# Altium PCB Power_Board.PcbDoc
Units mil, origin at the board's own origin, x right, y up, seen from the top; angles counter-clockwise.
Board outline 2965.03 x 3148.15 mil, 4 copper layers (Power, PGND, A_signal, Digital_signal), stack 23.756 mil thick; 119 components, 62 nets, 400 pads, 313 vias.
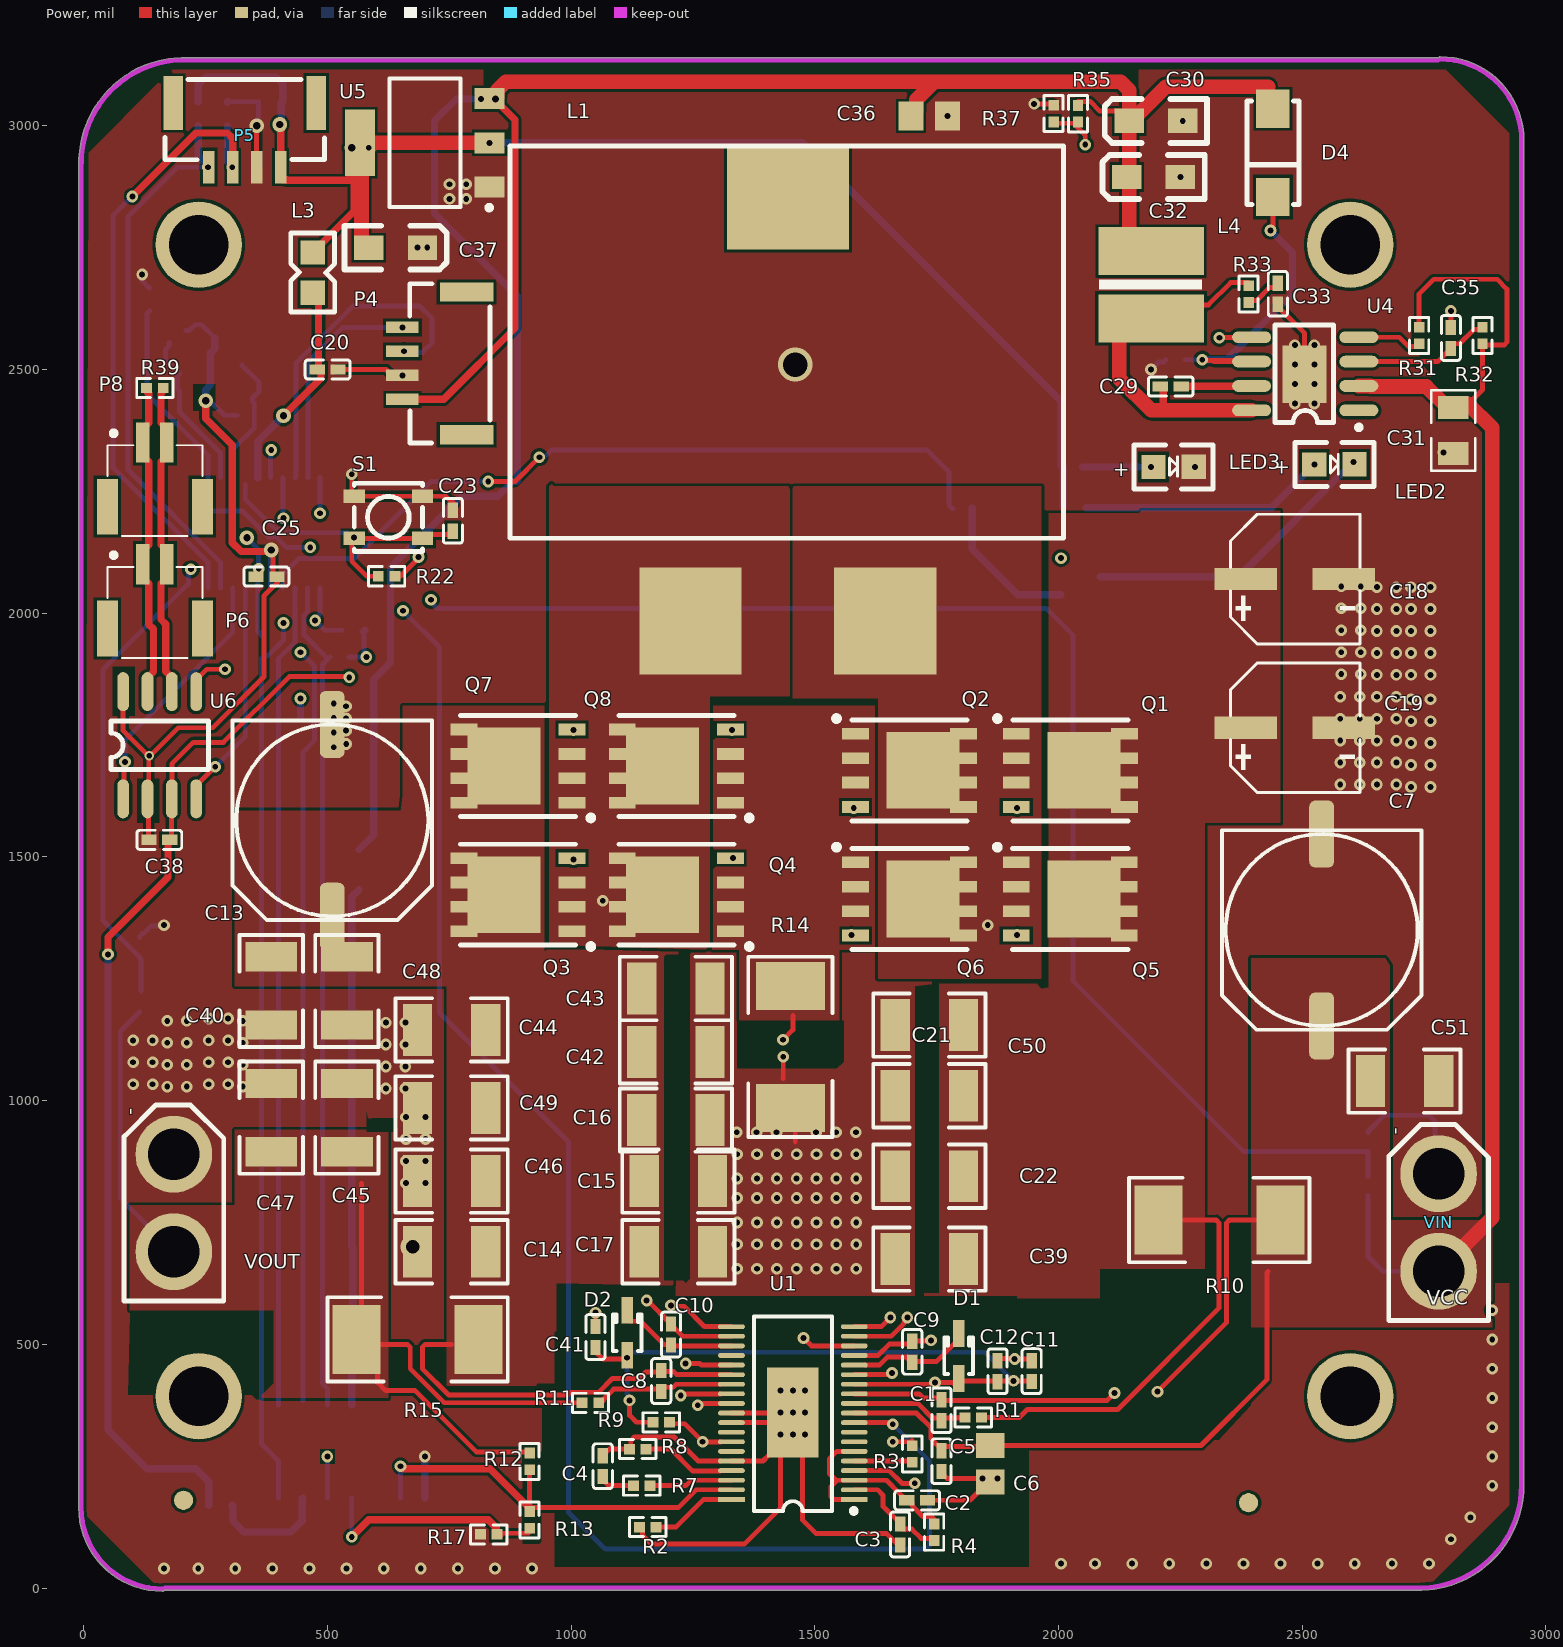
[diagram p0: Power view]
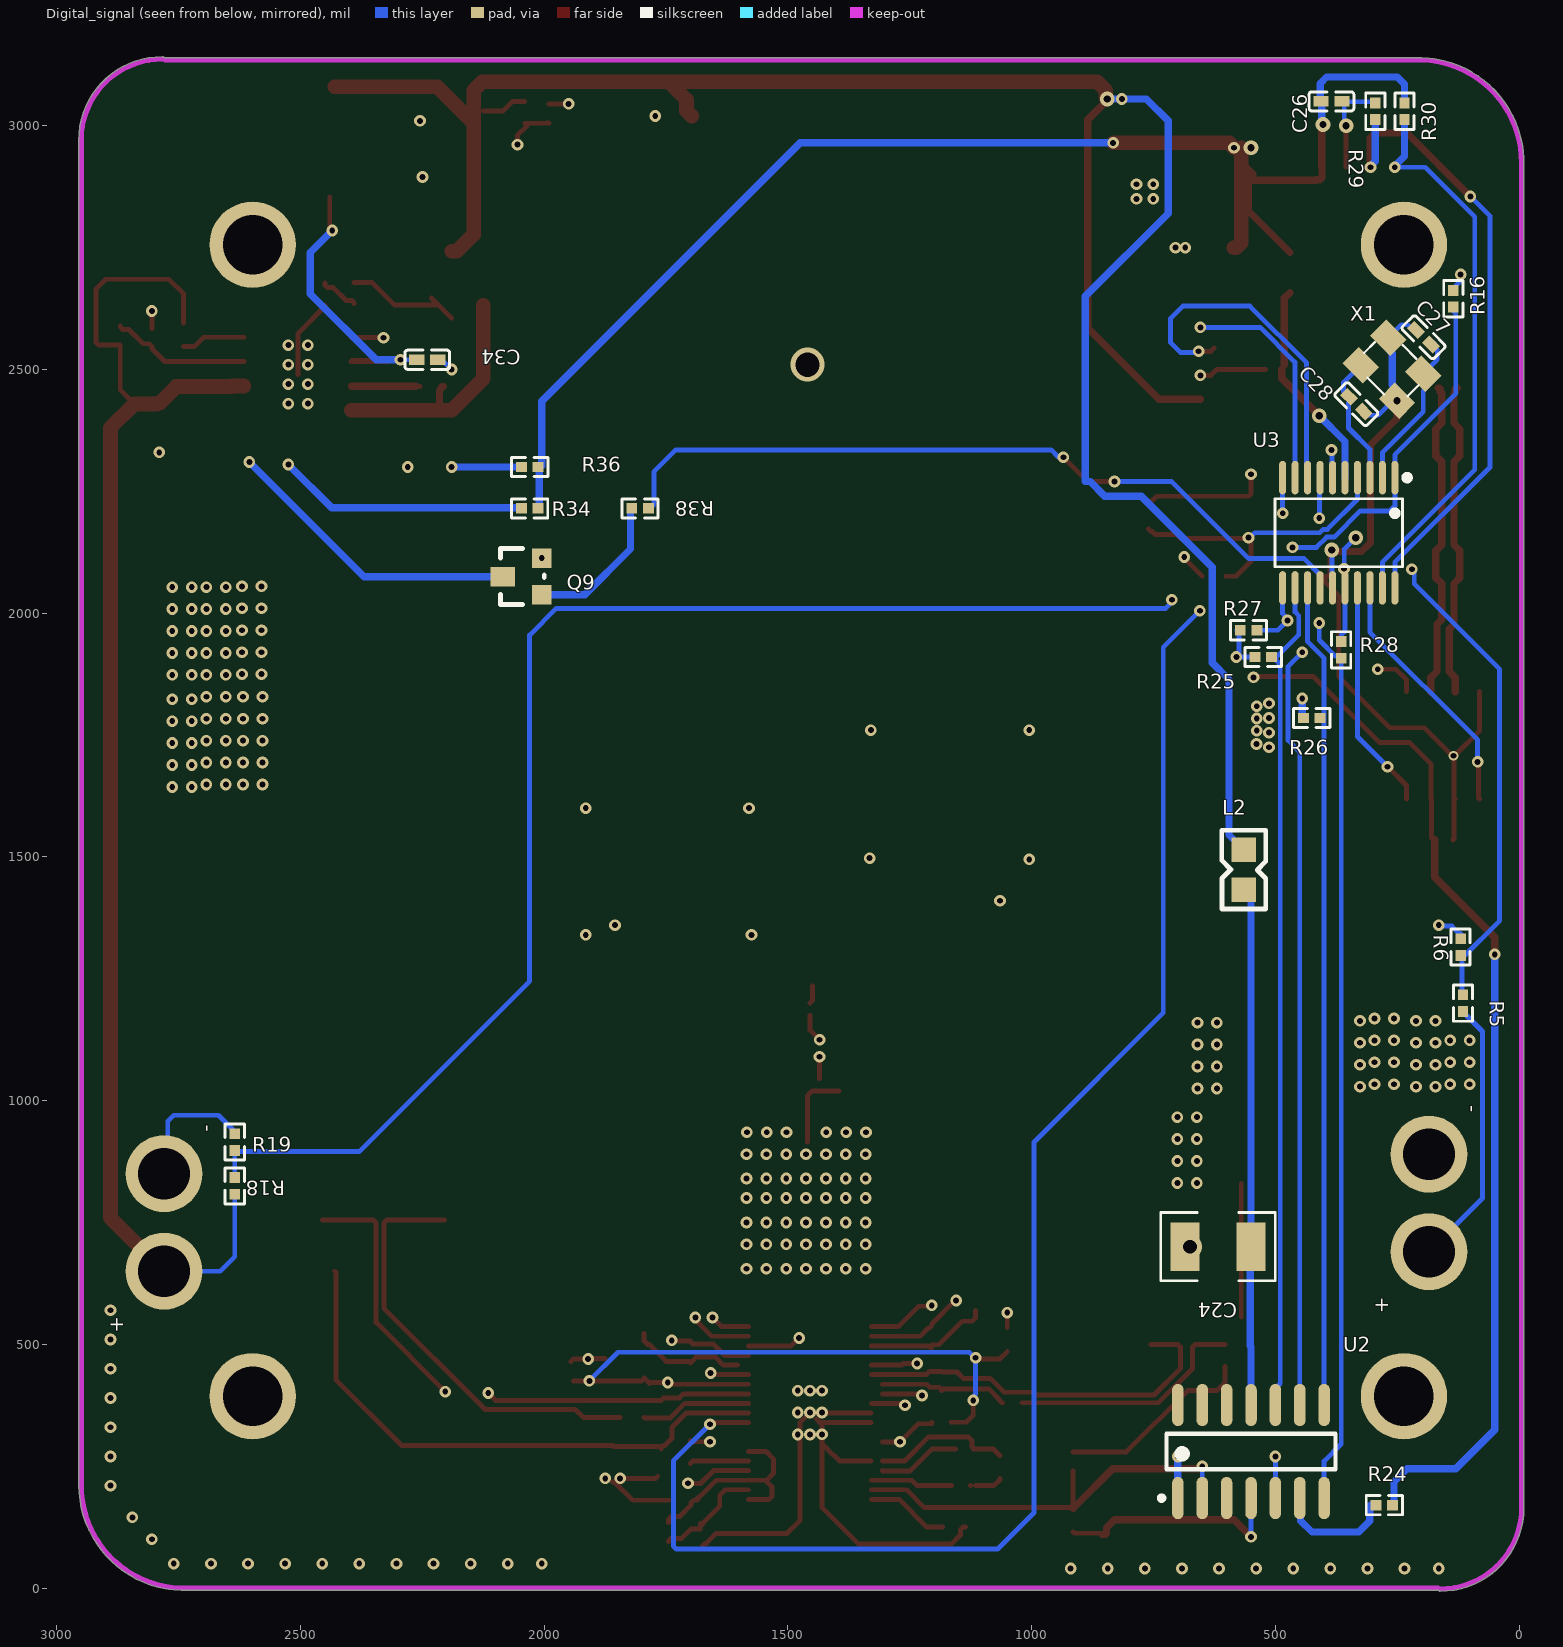
[diagram p1: Digital_signal view, seen from below]
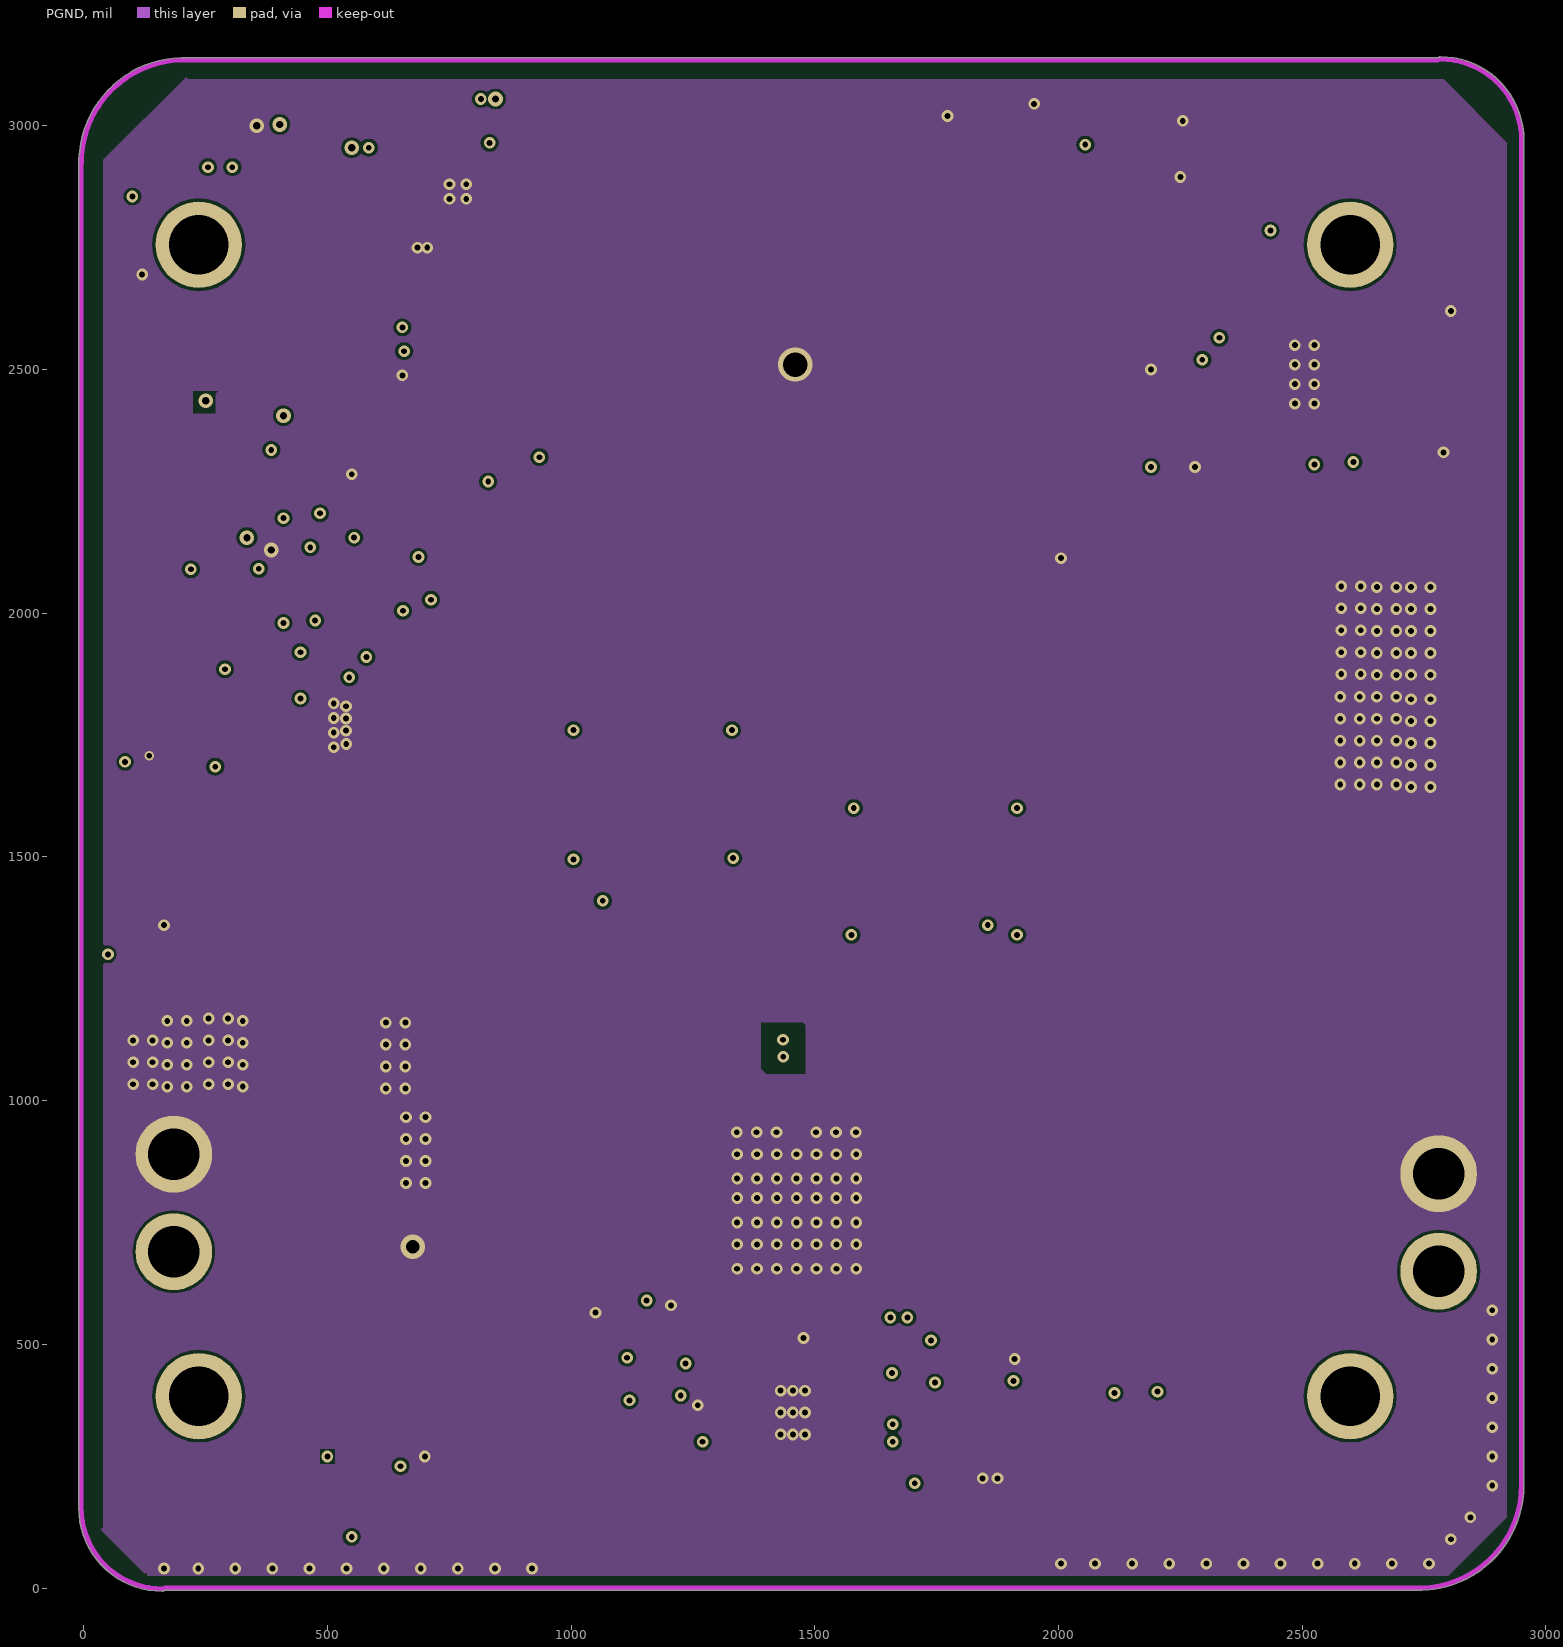
[diagram p2: PGND]
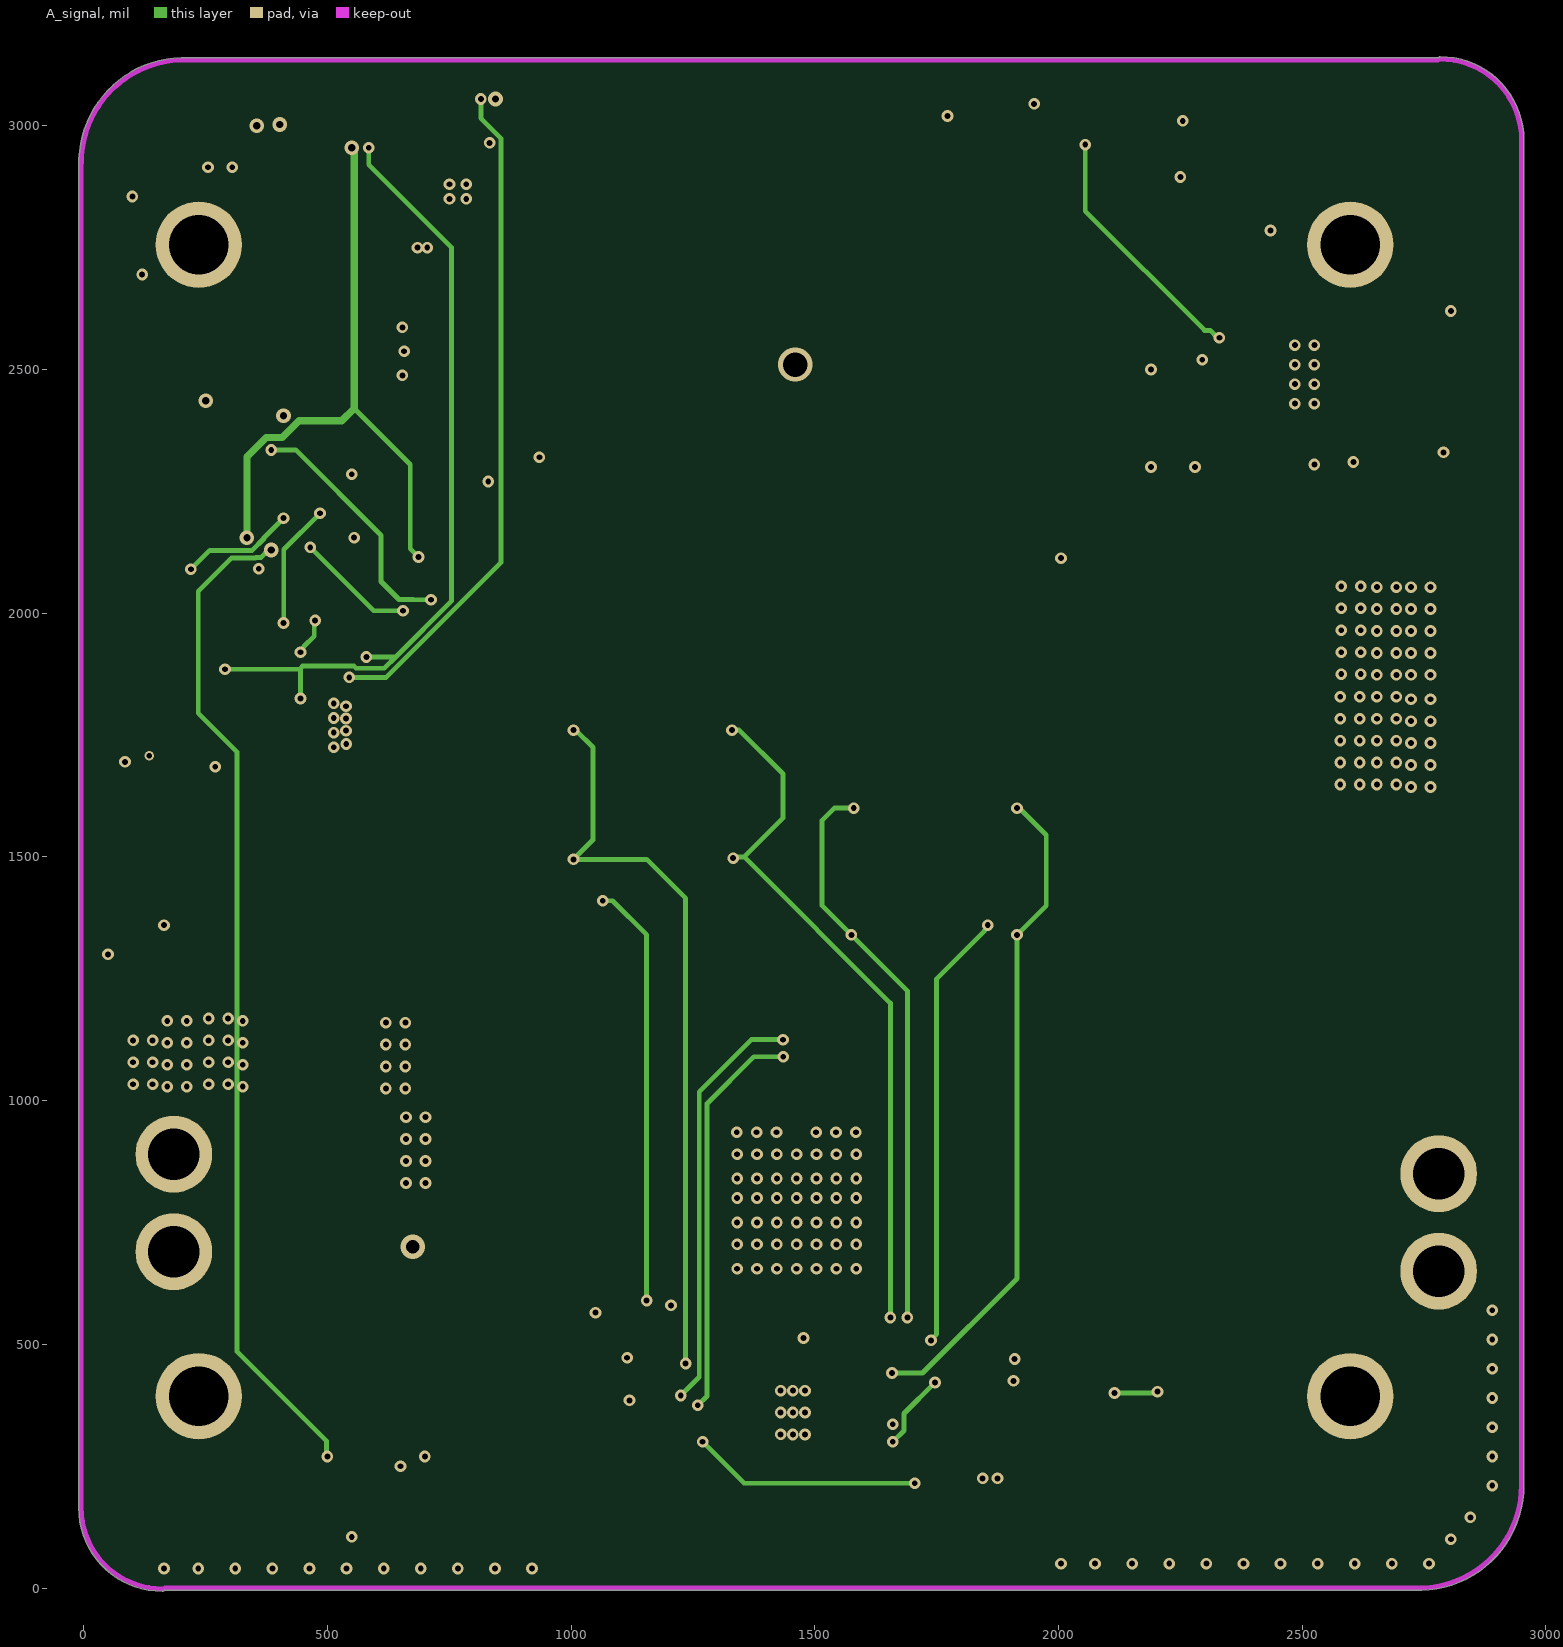
[diagram p3: A_signal]

## Layer stack, top to bottom
Top Solder: solder mask 0.4, Solder Resist, Dk 3.5
Power: signal copper 1.4
Dielectric 2: prepreg 2.8, PP-006, Dk 4.1
PGND: signal copper 1.378
Dielectric 1: dielectric 12.6, FR-4, Dk 4.8
A_signal: signal copper 1.378
Dielectric 3: prepreg 2.8, PP-006, Dk 4.1
Digital_signal: signal copper 1.4
Bottom Solder: solder mask 0.4, Solder Resist, Dk 3.5

## Board outline
161.32,-6.57 ccw(c161.32,-1.56) 165.09,-4.86 ccw(c166.32,0) 166.32,-5.01 2743.68,-5.01 ccw(c2743.68,0) 2744.57,-4.93 ccw(c2738.68,211.01) 2954.7,211.01 2954.7,2968.48 ccw(c2950,2970.24) 2955.02,2970.24 ccw(c2783.68,2970.24) 2783.68,3141.57 ccw(c2783.68,3136.56) 2779.91,3139.86 ccw(c2778.68,3135) 2778.68,3140.01 201.32,3140.01 ccw(c201.32,3135) 200.43,3139.93 ccw(c206.32,2923.99) -9.55,2932.11 ccw(c-5,2930) -10.02,2930 -10.02,164.76 ccw(c161.32,164.76)

## Design rules (kind name [scope] priority, off if disabled: settings)
Clearance [All] p1: gap=6 ignorepadtopadclearanceinfootprint=FALSE
DiffPairsRouting [All] p1: maxlimit=10 minlimit=10 mostfreqgap=10 toplayer_minwidth=10 toplayer_maxwidth=100 toplayer_prefwidth=15 midlayer1_minwidth=10 midlayer1_maxwidth=100 midlayer1_prefwidth=15 midlayer2_minwidth=10 midlayer2_maxwidth=100 midlayer2_prefwidth=15 bottomlayer_minwidth=10 bottomlayer_maxwidth=100 bottomlayer_prefwidth=15 maxuncoupledlength=500
HoleSize [All] p1: absolutevalues=TRUE maxlimit=500 minlimit=1 maxpercent=80.000 minpercent=20.000
HoleToHoleClearance [All] p1: gap=5 allowstackedmicrovias=TRUE
MinimumSolderMaskSliver [All] p1: minsoldermaskwidth=0
PolygonConnect [All] p1: connectstyle=Direct reliefconductorwidth=10 reliefentries=4 polygonreliefangle="90 Angle" airgapwidth=10
RoutingVias [All] p1: holewidth=12 width=24 viastyle="Through Hole" minholewidth=12 minwidth=24 maxholewidth=24 maxwidth=48
SilkToSilkClearance [All] p1: silktosilkclearance=0
SilkToSolderMaskClearance [IsPad] p1: minsilkscreentomaskgap=0 clearancetoexposedcopper=TRUE
SolderMaskExpansion [All] p1: expansion=4 istentingtop=FALSE
Width [All] p1: maxlimit=30 minlimit=10 preferedwidth=15
24 further rules are at their usual default settings.

## Classes and differential pairs
component class SuperCapBoostControl_3790_V2.2: C20 C23 C24 C25 C26 C27 C28 C29 C30 C31 C32 C33 C34 C35 C36 C37 C38 D4 L2 L3 L4 LED2 LED3 P4 P5 P6 P8 Q9 R16 R22 R24 R25 R26 R27 R28 R29 R30 R31 R32 R33 R34 R35 R36 R37 R38 R39 S1 U2 U3 U4 U5 U6 X1
component class SuperCapBoost_3790_V2.2: C1 C2 C3 C4 C5 C6 C7 C8 C9 C10 C11 C12 C13 C14 C15 C16 C17 C18 C19 C21 C22 C39 C40 C41 C42 C43 C44 C45 C46 C47 C48 C49 C50 C51 D1 D2 L1 Q1 Q2 Q3 Q4 Q5 Q6 Q7 Q8 R1 R2 R3 R4 R5 R6 R7 R8 R9 R10 R11 R12 R13 R14 R15 R17 R18 R19 U1 VIN VOUT
differential pair CAN_OUT: +CAN_OUT_P -CAN_OUT_N

## Components (designator, comment, footprint, x,y, rotation, side; value= is the part's Value field where it differs from the comment)
C1 "470nF" c0402 1760,364.69 r270 top
C2 "100nF" c0402 1710,180 r180 top
C3 "330nF" c0402 1675,110 r90 top
C4 "330nF" c0402 1065,250 r270 top
C5 "100nF 50V" c0402 1760,260.31 r90 top
C6 "1uf 50V" 0805-2 1860,255 r90 top
C7 "470uF 35v" C10X10 2540,1350 r90 top value=470uF
C8 "470nf" c0402 1185,424.68 r90 top value=470nF
C9 "100nF" c0402 1700,484.69 r270 top
C10 "100nF" c0402 1205,520 r270 top
C11 "100nF" c0402 1945,445 r270 top
C12 "4.7uF" c0402 1875,444.69 r270 top
C13 "470uf 35V" C10X10 510,1575 r90 top value=470uF
C14 "100uf" 1210 755,690 r0 top
C15 "100uf" 1210 1220,835 r180 top
C16 "100uf" 1210 1215,960 r180 top
C17 "100uf" 1210 1220,690 r180 top
C18 "47uf" 6.3*7.7MM 2485,2070 r180 top
C19 "47uf" 6.3*7.7MM 2485,1765 r180 top
C20 "0.1uf" c0402 500.56,2500 r0 top value=0.1uf'
C21 "4.7uf" 1210 1735,1010 r0 top
C22 "4.7uf" 1210 1735,845 r0 top
C23 "100nf" c0402 757.5,2189.69 r270 top
C24 "100uf" 1210C 685,700 r180 bottom
C25 "0.1uf'" c0402 375,2075 r0 top
C26 "100nF" c0402 385,3050 r0 bottom
C27 "27pf" c0402 196.08,2566.08 r45 bottom value=14pF
C28 "27pf" c0402 333.92,2428.92 r225 bottom value=14pF
C29 "104" c0402 2230.31,2465 r0 top
C30 "10uF 16V" 3216 2200,3010 r180 top value=337
C31 "10uf" 0805-1C 2810,2375 r270 top
C32 "10uF 16V" 3216 2195,2895 r180 top value=337
C33 "331" c0402 2450,2655.31 r90 top
C34 "104" c0402 2240,2520 r180 bottom
C35 "104" c0402 2805,2564.68 r90 top
C36 "4.7uf" 0805-2 1735,3020 r180 top value=4.7uF
C37 "10uf" 3216 640,2750 r0 top value=10uF
C38 "104" c0402 155.31,1535 r0 top
C39 "220uf" 1210 1735,675 r0 top
C40 "100uf" 1210 385,1225 r90 top
C41 "100nF" c0402 1050,515 r270 top
C42 "100uf" 1210 1215,1100 r180 top
C43 "100uf" 1210 1215,1230 r180 top
C44 "100uf" 1210 755,1145 r0 top
C45 "100uf" 1210 540,965 r90 top
C46 "100uf" 1210 755,835 r0 top
C47 "100uf" 1210 385,965 r270 top
C48 "100uf" 1210 540,1225 r90 top
C49 "100uf" 1210 755,985 r0 top
C50 "100uf" 1210 1735,1155 r0 top
C51 "220uf" 1210 2710,1040 r180 top
D1 "D-Schottky" sod323 1795,430 r90 top
D2 "D-Schottky" sod323 1115,477.48 r90 top
D4 "SS54B" DO-214 2440,3035 r270 top
L1 "10uH" SER-2900 1445,1983.86 r0 top locked
L2 "10uh" l0805 564.8,1432.7 r90 bottom value=47uH
L3 "10uh" l0805 470,2740 r270 top value=47uH
L4 "22uH" CD54NP 2189.98,2673.98 r90 top value=47uH
LED2 "LED_灯_黄" LED0805 2525,2305 r0 top
LED3 "LED_灯_黄" LED0805 2195,2300 r0 top
P4 "Header 4" "GH1.25 4P 立贴" 750,2510 r90 top
P5 "Header 4" "GH1.25 4P 立贴" 332.99,3011.07 r180 top locked
P6 "P2" GH1.25 155,2000 r180 top
P8 "P2" GH1.25 155,2250 r180 top
Q1 "sed10070gg" PG-TDSON-8 2040.39,1675.12 r270 top
Q2 "NTMFS5C670" PG-TDSON-8 1710.2,1675.12 r270 top
Q3 "sed10070gg" PG-TDSON-8 874.8,1424.88 r90 top
Q4 "NTMFS5C670" PG-TDSON-8 1199.8,1424.88 r90 top
Q5 "sed10070gg" PG-TDSON-8 2040.2,1411.32 r270 top
Q6 "NTMFS5C670" PG-TDSON-8 1710.2,1411.32 r270 top
Q7 "sed10070gg" PG-TDSON-8 874.8,1688.68 r90 top
Q8 "NTMFS5C670" PG-TDSON-8 1199.8,1688.68 r90 top
Q9 "SS8050" SOT-23 2004.37,2033.12 r90 bottom
R1 "51" r0402 1825,350 r180 top
R2 "220K" r0402 1157.18,125 r0 top
R3 "220K" r0402 1700,275 r270 top
R4 "100K" r0402 1745,114.69 r270 top
R5 "10K" r0402 115,1200 r270 bottom
R6 "1K" r0402 120,1315 r90 bottom
R7 "3.3K" r0402 1145,210 r0 top
R8 "150K" r0402 1136.8,285 r0 top
R9 "100K" r0402 1185,340 r180 top
R10 "0.002" 2512 2330,755 r180 top
R11 "0" r0402 1039.69,380 r180 top
R12 "51K" r0402 915,259.68 r90 top
R13 "0" r0402 915,139.69 r270 top
R14 "0.002" 2512 1450,1110 r270 top
R15 "0.002" 2512 685,510 r180 top value=0.004
R16 "10K" r0402 135,2645 r270 bottom
R17 "2.2K" r0402 831.01,110 r0 top
R18 "10K" r0402 2635,825 r270 bottom
R19 "1K" r0402 2635,915 r90 bottom
R22 "10K" r0402 621.56,2075.84 r180 top
R24 "10K" r0402 276.49,170 r180 bottom
R25 "10K" r0402 525,1910 r180 bottom
R26 "10K" r0402 425.31,1785 r0 bottom
R27 "10K" r0402 555,1965 r0 bottom
R28 "10K" r0402 365,1924.68 r90 bottom
R29 "10K" r0402 295,3029.69 r270 bottom
R30 "10K" r0402 235,3029.69 r270 bottom
R31 "500K" r0402 2740,2569.68 r90 top
R32 "200K" r0402 2870,2569.69 r270 top
R33 "4.7" r0402 2390,2654.69 r270 top
R34 "2K" r0402 2030,2215 r0 bottom
R35 "160K" r0402 2040,3024.69 r270 top
R36 "1K" r0402 2029.69,2300 r180 bottom
R37 "51K" r0402 1990,3025 r270 top
R38 "2K" r0402 1803.51,2215 r0 bottom
R39 "120R" r0402 146.17,2462.07 r180 top
S1 "SW" KEY_SMD 625.12,2196.69 r0 top
U1 "LT3790EFE" TSSOP38 1455,359.02 r180 top
U2 "AD8402ARZ100" SOIC14 550,280 r90 bottom
U3 "STM32F042F6P6" TSSOP-20 370,2165 r0 bottom
U4 "SY8501" SO8E 2616.23,2416.2 r180 top
U5 "LM1117S-3.3" sot-223 700,2965 r90 top
U6 "MCP2562-E/MF" LM358 160,1715 r90 top
VIN "xt30" XT30-M 2780,750 r90 top
VOUT "xt30" XT30-M 185,790 r90 top
X1 "12M" XTAL-3225 260,2500 r315 bottom

## Footprints (in the part's own frame and the unit in brackets; to place one, negate y for a bottom-side part, rotate by r counter-clockwise, add the part's x,y. Pads: shape width x height; smd on the part's side, far side on the other; paste and mask are expansions set on the pad)
6.3*7.7MM [mm] "6.3*7.7MM电解电容"
  rect 3.26x1.15 smd: 1(2.555,0) 2(-2.555,0)
  silkscreen extent -3.39,-3.38 3.36,3.38
0805-1C [mm]
  rect 1.2x1.6 smd: 1(-1.2,0) 2(1.2,0)
  silkscreen extent -2.1,-1.15 2.1,1.15, body extent -1.46,-0.72 1.54,0.68, height 0.93
0805-2 [mm] "贴片无丝印"
  rect 1.3x1.5 smd: 1(-0.95,0) 2(0.95,0)
1210 [mil] "贴片元件"
  rect 60x106.3 smd: 1(-70,0) 2(70,0)
  silkscreen extent -115,-65 115,65, body extent -65,-50 65,50, height 39
1210C [mil]
  rect 60x100 smd: 1(-0.2,0.32) 2(134.8,0.32)
  silkscreen extent -50,-70 185,70, body extent 4,-49 130,50, height 51
2512 [mm] "保险丝"
  rect 2.5x3.6 smd: 1(-3.175,0) 2(3.175,0)
  silkscreen extent -4.7,-2.2 4.7,2.2, body extent -3.18,-1.65 3.18,1.65, height 1.2
3216 [mil]
  rect 60x50 smd: 1(55,0) 2(-55,0)
  silkscreen extent -105,-45 105,45, body extent -63,-31 63,31, height 63
C10X10 [mm]
  rrect50% 3.5x1.3 smd: 1(-5,0) 2(5,0)
  silkscreen extent -5.2,-5.2 5.2,5.2, body extent -5.77,-5.12 5.83,5.18, height 10.21
c0402 [mm]
  rect 0.79x0.54 smd paste-100 mask+0.051: 1(-0.545,0) 2(0.545,0)
  silkscreen extent -1.17,-0.5 1.17,0.5
CD54NP [mm]
  rect 2.5x5.5 smd mask+0: 1(-1.752,-0.001) 2(1.748,-0.001)
  silkscreen extent -0.25,-2.64 0.28,2.72, body extent -2.89,-2.6 2.87,2.6, height 4.5
DO-214 [mm]
  rect 2x1.75 smd: 1(0,0) 2(4.6,0)
  silkscreen extent -0.4,-1.35 5,1.35, body extent -0.2,-1.34 4.91,1.33, height 2.12
GH1.25 [mm]
  rect 1.1x2.9 smd: 0(-2.25,0.8) 0(2.7,0.8)
  rect 0.7x2.1 smd: 1(0.85,-2.55) 2(-0.4,-2.55)
  silkscreen extent -2.25,-3.15 2.7,2.32, body extent -2.09,-3.41 2.41,2.39, height 4.1
"GH1.25 4P 立贴" [mm]
  rect 0.6x1.7 smd: 1(-1.809,2.44) 2(-0.559,2.44) 3(0.691,2.44) 4(1.941,2.44)
  rect 1x2.8 smd: 5(3.791,-0.91) 6(-3.659,-0.91)
  silkscreen extent -4.08,-2.13 4.22,2.05
KEY_SMD [mm]
  rect 1.1x0.7 smd: 1(-1.775,-1.1) 1(1.775,-1.1) 2(-1.775,1.1) 2(1.775,1.1)
  silkscreen extent -1.78,-1.78 1.78,1.78
l0805 [mil] "1/8W"
  rect 50x50 smd: 1(0,0) 2(82.3,0.2)
  silkscreen extent -40,-45 122,45, body extent 1,-24 80,25, height 22
LED0805 [mil]
  rect 50x50 smd: 1(0,0) 2(82.3,0.2)
  silkscreen extent -40,-45 122,45, body extent 2,-25 80,25, height 20
LM358 [mil]
  oval 80x24 smd: 1(-96,79) 2(-96,29) 3(-96,-21) 4(-96,-71) 5(124,-71) 6(124,-21) 7(124,29) 8(124,79)
  silkscreen extent -36,-96 64,104, body extent -104,-94 134,104, height 63
PG-TDSON-8 [mm]
  rect 0.61x1.4 smd: 1(1.843,-3.224) 2(-1.967,2.408) 2(-0.697,2.408) 2(0.573,2.408) 2(1.843,2.408) 3(-1.967,-3.224) 3(-0.697,-3.224) 3(0.573,-3.224)
  rect 4x3.81 smd: 2(-0.062,0.308)
  silkscreen extent -2.89,-4.33 2.57,2.59
r0402 [mm]
  rect 0.566x0.54 smd paste-100 mask+0.051: 1(-0.433,0) 2(0.433,0)
  silkscreen extent -0.94,-0.5 0.94,0.5
SER-2900 [mm]
  rect 5.33x5.59 smd: 1(-5.075,0) 2(5.075,0)
  rect 6.35x5.28 smd: 3(0,22)
  silkscreen extent -14.48,4.32 14.35,24.77
SO8E [mil]
  oval 80x24 smd: 1(0,0) 2(0,-50) 3(0,-100) 4(0,-150) 5(220,-150) 6(220,-100) 7(220,-50) 8(220,0)
  rect 90.55x117.72 smd: 9(111.23,-73.8)
  silkscreen extent -5,-175 172,40, body extent -8,-173 230,25, height 63
sod323 [mm] "0805"
  rect 1.4x0.6 smd: 1(0,0) 2(2.35,0)
  silkscreen extent 0.22,-0.75 2.12,0.75, body extent -0.17,-0.67 2.43,0.63, height 1
SOIC14 [mm]
  oval 2.2x0.6 smd: 1(-2.425,3.81) 2(-2.425,2.54) 3(-2.425,1.27) 4(-2.425,0) 5(-2.425,-1.27) 6(-2.425,-2.54) 7(-2.425,-3.81) 8(2.425,-3.81) 9(2.425,-2.54) 10(2.425,-1.27) 11(2.425,0) 12(2.425,1.27) 13(2.425,2.54) 14(2.425,3.81)
  silkscreen extent -2.55,-4.4 0.93,4.79, body extent -2.9,-4.24 2.9,4.29, height 1.75
SOT-23 [mil]
  rect 40x40 smd: 1(4.88,0.63) 2(79.88,0.63)
  rect 40x50 smd: 3(41.88,80.63)
  silkscreen extent -15,-4 100,86, body extent -15,-11 99,99, height 47
sot-223 [mm]
  rect 1.1x1.55 smd: 1(-2.3,-3.375) 2(0,-3.375) 3(2.3,-3.375)
  rect 3.45x1.55 smd: 4(0,3.375)
  silkscreen extent -3.5,-3.48 3.35,1.85, body extent -3.3,-3.94 3.3,3.43, height 0.8
TSSOP38 [mm]
  rect 1.4x0.25 smd: 1(-3.2,4.5) 38(3.2,4.5)
  oval 1.4x0.25 smd: 2(-3.2,4) 3(-3.2,3.5) 4(-3.2,3) 5(-3.2,2.5) 6(-3.2,2) 7(-3.2,1.5) 8(-3.2,1) 9(-3.2,0.5) 10(-3.2,0) 11(-3.2,-0.5) 12(-3.2,-1) 13(-3.2,-1.5) 14(-3.2,-2) 15(-3.2,-2.5) 16(-3.2,-3) 17(-3.2,-3.5) 18(-3.2,-4) 19(-3.2,-4.5) 20(3.2,-4.5) 21(3.2,-4) 22(3.2,-3.5) 23(3.2,-3) 24(3.2,-2.5) 25(3.2,-2) 26(3.2,-1.5) 27(3.2,-1) 28(3.2,-0.5) 29(3.2,0) 30(3.2,0.5) 31(3.2,1) 32(3.2,1.5) 33(3.2,2) 34(3.2,2.5) 35(3.2,3) 36(3.2,3.5) 37(3.2,4)
  rect 2.7x4.7 smd: 39(0,-0.025)
  silkscreen extent -3.3,-5.02 2.03,5.23, body extent -3.2,-4.63 3.2,5.17, height 1.03
TSSOP-20 [mm]
  oval 0.364x1.742 smd: 1(-2.925,-2.871) 2(-2.275,-2.871) 3(-1.625,-2.871) 4(-0.975,-2.871) 5(-0.325,-2.871) 6(0.325,-2.871) 7(0.975,-2.871) 8(1.625,-2.871) 9(2.275,-2.871) 10(2.925,-2.871) 11(2.925,2.871) 12(2.275,2.871) 13(1.625,2.871) 14(0.975,2.871) 15(0.325,2.871) 16(-0.325,2.871) 17(-0.975,2.871) 18(-1.625,2.871) 19(-2.275,2.871) 20(-2.925,2.871)
  silkscreen extent -3.71,-3.02 3.33,1.77
XT30-M [mm]
  round 4 hole 2.7: 1(-2.54,0) 2(2.54,0)
  silkscreen extent -5.1,-2.6 5.11,2.6, body extent -5.1,-2.8 5.1,2.8, height 10.66
XTAL-3225 [mil]
  rect 47.24x59.06 smd: 1(-38.5,51) 2(-39.5,-52) 3(39.5,-52) 4(38.5,52)
  silkscreen extent -50,-65 48,61, body extent -50,-65 48,61, height 31

## Part data
C1 C2 C3 C4 C5 C6 C8 C9 C10 C11 C12 C14 C15 C16 C17 C20 C21 C22 C23 C24 C25 C26 C27 C28 C29 C31 C33 C34 C36 C37 C39 C40 C41 C42 C43 C44 C45 C46 C47 C48 C49 C50 C51: library part Cap, "无极性电容", LatestRevisionDate=17-Jul-2002, LatestRevisionNote="Re-released for DXP Platform.", PackageReference=RAD-0.3, Published=8-Jun-2000, Publisher="Altium Limited"
C7 C13 C18 C19: library part "Cap Pol", "极性电解电容", LatestRevisionDate=17-Jul-2002, LatestRevisionNote="Re-released for DXP Platform.", PackageReference=RB7.6-15, Published=8-Jun-2000, Publisher="Altium Limited"
  C7 C13: Vol=35V
  C18 C19: Vol=50V
C30 C32: library part CAP2, "贴片电解", PackageDescription="Capacitor; 2 Leads", PackageReference=CAPR5-4X5, Published=23-Sep-2002, Publisher="Altium Limited"
C35: library part CAP-W, "贴片电容1206", C=104
C38: library part C, "贴片电容", BOM名称=无极性贴片电容, 封装库来自淘宝卖家ID：黄晶宝石=其他店铺购入均为盗版假冒封装库，请立即申请退款, 联系卖家，免费查找封装=唯一出售店铺网址https://shop463601444.taobao.com
D1 D2: "肖特基二极管", Code_JEDEC=DO-214-AA, LatestRevisionDate=17-Jul-2002, LatestRevisionNote="Re-released for DXP Platform.", PackageReference=SMB, Published=8-Jun-2000, Publisher="Altium Limited", Type=BAT46WJ
D4: library part Diode, "肖特基二极管", Code_JEDEC=DO-214-AB, LatestRevisionDate=17-Jul-2002, LatestRevisionNote="Re-released for DXP Platform.", PackageDescription="DO-214-AB/SMC; 2 C-Bend Leads; Body 7.9 x 5.9 mm, inc. leads (LxW)", PackageReference=SMC, PackageVersion=Sep-1996, Published=8-Jun-2000, Publisher="Altium Limited"
L1: library part L, "扁铜线功率电感", L="3.3uh 68.4A"
L2 L3 L4: library part Inductor, "功率电感", Code_IEC=1005, Code_JEITA=0402, LatestRevisionDate=29-May-2009, LatestRevisionNote="IPC-7351 Footprint Added.", PackageDescription="Chip Inductor", PackageReference=0402-A, Published=8-Jun-2000, Publisher="Altium Limited"
LED2 LED3: library part LED, "贴片LED", COLOR=blue
P4 P5: "排针", LatestRevisionDate=17-Jul-2002, LatestRevisionNote="Re-released for DXP Platform.", Publisher="Altium Limited"
Q1 Q2 Q3 Q4 Q5 Q6 Q7 Q8: library part NMOS-2, "MOS", ComponentLink1Description="Manufacturer Link", ComponentLink1URL=http://www.irf.com/, DatasheetVersion=PD-9.814, LatestRevisionDate=17-Jul-2002, LatestRevisionNote="Re-released for DXP Platform.", Note="Pin 2 is electrically connected to pin 4.", PackageDescription="TO, Thru-Hole, Vertical, Heatsink Mounted; 3 In-Line Leads; Pitch 2.54 mm", PackageReference=TO-220AB, PackageVersion=Feb-1997, Published=8-Jun-2000, Publisher="Altium Limited"
Q9: "NPN贴片三极管", PackageDocument=Sep-1998, Code_JEDEC=TO-92A, ComponentLink1Description="Manufacturer Link", ComponentLink1URL=http://www.fairchildsemi.com/, ComponentLink2Description=Datasheet, ComponentLink2URL=http://www.fairchildsemi.com/ds/2N%2F2N3904.pdf, DatasheetDocument=1997, LatestRevisionDate=15-Jan-2003, LatestRevisionNote="PCB Footprint 'BCY-W3/D4.7' replaced", PackageReference=TO-92A, Published=8-Jun-2000, Publisher="Altium Limited"
R1 R2 R3 R4 R5 R6 R7 R8 R9 R10 R11 R12 R13 R14 R15 R17 R18 R19 R29 R30 R34 R36 R38: library part Res1, "贴片电阻", LatestRevisionDate=17-Jul-2002, LatestRevisionNote="Re-released for DXP Platform.", PackageReference=AXIAL-0.4, Published=8-Jun-2000, Publisher="Altium Limited"
R16 R22 R24 R25 R26 R27 R28 R31 R32 R33 R35 R37 R39: library part R, "贴片电阻", BOM名称=贴片电阻, 封装库来自淘宝卖家ID：黄晶宝石=其他店铺购入均为盗版假冒封装库，请立即申请退款, 联系卖家，免费查找封装=唯一出售店铺网址https://shop463601444.taobao.com
U1: library part LT3790, "DC-DC芯片"
U2: BOM_Manufacturer=ADI(亚德诺)/LINEAR, BOM_Manufacturer Part=AD8402ARZ100, BOM_Supplier=LCSC, BOM_Supplier Part=C652776, Contributor=LCSC, spicePre=U, spiceSymbolName=AD8402ARZ100
U3: BOM_JLCPCB Part Class="Extended Part", BOM_Manufacturer=STMicroelectronics, BOM_Manufacturer Part=STM32F042F6P6, BOM_Supplier=LCSC, BOM_Supplier Part=C81000, spicePre=U, spiceSymbolName=STM32F042F6P6
U4: "电源管理芯片"
U6: library part TLP250
VIN VOUT: library part "Header 2", "接插件", LatestRevisionDate=17-Jul-2002, LatestRevisionNote="Re-released for DXP Platform.", Publisher="Altium Limited"
X1: library part XTAL-4P, "4脚无源晶振"

## Free pads (board coordinates)
  round 177.16 hole 122.05: 5(236.22,393.7) 5(236.22,2755.91) 5(2598.43,393.7) 5(2598.43,2755.91)
  round 39.37 smd: 6(205,180) 6(2390,175)

## Via types
v1: diameter 24, hole 12, Power to Digital_signal, 302 vias
v2: diameter 30, hole 15, Power to Digital_signal, 8 vias
v3: diameter 20, hole 12, Power to Digital_signal, 1 vias
v4: diameter 50, hole 28, Power to Digital_signal, 1 vias
v5: diameter 70, hole 50, Power to Digital_signal, 1 vias

## Nets (pads, with @x,y where several pads share a name; then routed paths per layer and width w, separated by ;. In a path a pad name is that pad's centre, name@x,y a point inside that pad or via, vN(x,y) a via of type N, cw(c..) or ccw(c..) an arc to the next point about the centre after c; other vN are vias at no path point)
5V: C30.1 C32.1 C36.2 C38.2 D4.1 L2.2 L4.2 P4.1 R24.2 R35.1 U5.3 U6.3 | length 8377.1
  Power w10: C38.2@175,1535 175.16,1535 180,1539.84 180,1618 U6.3 181,1691 225,1735 286.81,1735 421.81,1870 543.35,1870 v1(545,1868.35) ; R35.1@2040.34,3050 2065,3050 2085,3030 C30.1@2125,3030
  Power w15: v1(50,1300) 50,1335 173.2,1458.2 C38.2@173.2,1535 ; P4.1 738.78,2438.78 885,2585 885,3012.28 845,3052.28 v2(845,3055)
  Power w30: v2(845,3055) 848.39,3058.39 848.39,3072.43 865.96,3090 1745,3090 ; C36.2 1708.19,3030.59 1708.19,3053.19 1745,3090 ; C30.1@2145,3005 2145,2777.01 2179.21,2742.8 L4.2 ; C30.1 2145,3072.43 2127.43,3090 1745,3090 ; C30.1@2150,3010 2220,3080 2429.92,3080
  A_signal w10: v1(545,1868.35) 620.83,1868.35 855.87,2103.4 855.87,2974.53 815,3015.4 v1(815,3055)
  Digital_signal w15: v1(50,1300) 50,325 130,245 230,245 256.8,218.2 R24.2@256.8,170 ; L2.2 595,1545 595,1863.94 629.5,1898.44 629.5,2094.01 775.49,2240 850,2240 880,2270 890,2270 890,2650 720,2820 720,3010 765,3055 v1(815,3055) 815.28,3055.28 815.55,3055 v2(845,3055)
8051FB: R35.2 R37.2 U4.5 | length 671.7
  Power w10: R37.2@1990,3005.31 1995,3005.31 1995.16,3005.16 2035.28,3005.16 2039.84,3005.16 R35.2@2040,3005 ; R35.2@2035.28,3000.28 2055,2980.55 v1(2055,2961.25) ; v1(2330,2565) 2330.6,2565.6 2395.64,2565.6 U4.5
  A_signal w10: v1@2055,2950 2055,2825 2299.87,2580.13 2311.08,2580.13 2326.21,2565 v1(2330,2565)
8402_CLK: R27.1 U2.9 U3.11 | length 1768.8
  A_signal w10: v1(445,1920) 445,1923.79 451.59,1930.38 451.59,1931.59 473,1953 473,1983 v1(475,1985)
  Digital_signal w10: v1(445,1920) 474,1891 474,1739 450,1715 U2.9@450,385 ; U3.11 485.16,1998.95 475,1988.79 v1(475,1985) 495,1965 528.5,1965 R27.1@530,1965
8402_CS: R28.1 U2.7 U3.10 | length 2161.9
  A_signal w10: v1(410,1980) 410.61,1980.61 410.61,2130.61 v1(485,2205)
  Digital_signal w10: U2.7 400,260.43 365,295.43 365,1905 365,1906.97 369.84,1911.81 376.81,1911.81 410,1945 v1(410,1980) ; v1(485,2205) 485.08,2205.08 485.08,2277.95 U3.10
8402_RESET: R25.2 U2.10 U3.12 | length 1715
  Digital_signal w10: U3.12 459.57,2002.68 452,1995.11 452,1955.53 R25.2@501,1906.53 ; U2.10 500,409.64 490,419.64 490,1894.69 498.5,1903.19 498.5,1905.16 499.45,1906.11 501.42,1906.11 R25.2@505.31,1910
8402_SDI: R26.1 U2.8 U3.13 | length 1690.6
  Digital_signal w10: U2.8 400,1907.53 433.98,1941.5 U3.13
8501VCC: C34.1 D4.2 U4.6 | length 678.8
  Power w10: v1(2295,2520) 2296.9,2518.1 2316.9,2518.1 ; v1(2435,2785) 2440,2790 D4.2 ; 2316.9,2518.1 2318.8,2516.2 U4.6 2394.33,2518.1 2316.9,2518.1
  Digital_signal w10: C34.1@2259.69,2520 v1(2295,2520)
  Digital_signal w15: v1(2295,2520) 2345,2520 2480,2655 2480,2740 v1(2435,2785)
+3.3: C25.1 C26.2 C37.2 L3.1 P5.1 R22.1 R25.1 R26.2 R27.2 R28.2 R30.1 R34.1 R36.2 U3.16 U5.2 U5.4 U6.5 | length 6358.2
  Power w10: U6.5 231,1863.21 252.79,1885 v1(290,1885) ; 650.07,2075.84 687.04,2112.81 v1(687.04,2115.49)
  Power w15: v2(402.3,3002.7) 404.61,3000.39 404.61,2915.39 P5.1 404.21,2893.35 408.52,2889.04 416.38,2889.04 417.31,2888.11 546.21,2888.11 U5.4@546.21,2901.21 ; L3.1 555,2825 555,2879.32 ; 568.11,2879.32 U5.4@546.21,2901.21 ; U5.4@570,2925 U5.4@546.21,2901.21
  Power w30: U5.4@570,2955 570,2925 570,2760 580,2750 C37.2 ; v1(585,2955) 595,2965 v1(832.87,2965)
  A_signal w10: v1(290,1885) 443,1885 445,1887 ; v1(445,1825) 445,1887 ; 555,2420 670,2305 670,2132.53 v1(687.04,2115.49) ; v1(580,1910) 585,1910 585.08,1910.08 639.92,1910.08 ; v1(585,2955) 585,2920 755,2750 755,2025.15 639.92,1910.08 ; 445,1887 449.35,1891.35 554.53,1891.35 558.88,1887 616.85,1887 639.92,1910.08
  A_signal w15: v2(335,2155) 335,2321.06 374.44,2360.5 407.66,2360.5 441.95,2394.79 529.79,2394.79 555,2420 555,2425 v2@555,2950
  Digital_signal w10: v2(335,2155) 358.61,2131.39 358.61,2091.84 v1(359.37,2091.08) ; v1@357.2,2091.08 U3.16 357.2,1963.49 365,1955.7 365,1953.2 ; R25.1@544.69,1910 v1(580,1910) 575,1915 575,1961.8 R27.2@578.2,1965
  Digital_signal w15: R30.1@235,3049.37 235,3085 250,3100 395,3100 408.2,3086.8 408.2,3050.53 405.17,3047.5 405.17,3005.57 v2(402.3,3002.7) ; R26.2@445,1785 v1(445,1825) ; R27.2@573.6,1962.5 576.1,1965 R27.2@576.8,1965 ; v1(832.87,2965) 1475,2965 2005,2435 2005,2302.5 2007.5,2300 2010,2300 R34.1@2010,2217.5
  other v2: 550,2955
ADC_IN: R18.1 R19.1 U3.6 | length 3429.3
  A_signal w10: v1(385,2335) 435,2335 610,2160 610,2065 647,2028 676.27,2028 676.72,2027.55 v1(712.45,2027.55)
  Digital_signal w10: U3.6 383.62,2278.86 383.62,2333.62 v1(385,2335) ; v1(712.45,2027.55) 712.45,2022.55 725,2010 1975,2010 2030,1955 2030,1245 2379.69,895.32 2635,895.32 R18.1@2635,844.69
ADC_OUT: R5.1 R6.1 U3.7 | length 1289.8
  A_signal w10: v1(220,2090) 259,2129 345.77,2129 370,2153.23 370,2155 v1(410,2195)
  Digital_signal w10: R5.1@117.5,1225.07 117.5,1289.3 115,1291.8 115,1294.3 40,1369.3 40,1885 215,2060 215,2085 v1(220,2090) ; U3.7 409.19,2277.22 409.19,2195.81 v1(410,2195)
BG1: Q2.1 Q6.1 U1.18 | length 1295.7
  Power w10: U1.18 1656.5,516.5 1683.41,543.41 1683.41,544.62 1690,551.21 v1(1690,555)
  A_signal w10: v1(1580,1600) 1540,1600 1515,1575 1515,1400 v1(1575,1340) 1690,1225 v1(1690,555)
BG2: Q4.1 Q8.1 U1.19 | length 1520
  Power w10: U1.19 1636.18,536.18 v1(1655,555)
  A_signal w10: v1(1330,1760) 1345,1760 1435,1670 1435,1580 1355,1500 ; v1(1332.5,1497.5) 1335,1500 1355,1500 ; v1(1655,555) 1655,1200 1355,1500
BOOST_EN: R16.2 U1.9 U3.1 | length 4068.8
  Power w10: U1.9 1652.9,339.33 1656.21,336.02 v1(1660,336.02)
  A_signal w10: v1(465,2135) 595,2005 v1(655,2005)
  Digital_signal w10: R16.2@135,2620 130,2615 130,2450 254.84,2325.16 U3.1 254.84,2220.16 265,2210 325.61,2210 379.61,2156 394.95,2156 415.95,2135 v1(465,2135) ; v1(655,2005) 730,1930 730,1180 995,915 995,155 1070,80 1729.14,80 1735,85.86 1735,261.02 v1(1660,336.02)
CAN_OUT_N: P6.2 P8.2 R39.1 U6.6 | length 656.5
  Power w15: 158.64,2412.5 158.64,2390.06 170.75,2377.95 P8.2 170.75,2322.83 158.64,2310.73 158.64,2140.06 170.75,2127.95 P6.2 170.75,2072.83 158.64,2060.73 158.64,1987.13 168.5,1977.27 168.5,1880.29 181,1867.79 U6.6 ; 158.67,2412.53 158.67,2450.94 161.55,2453.82 161.55,2459.73 163.89,2462.07 R39.1@165.86,2462.07
CAN_OUT_P: P6.1 P8.1 R39.2 U6.7 | length 656.5
  Power w15: R39.2@126.49,2462.07 128.45,2462.07 130.8,2459.73 130.8,2453.82 133.67,2450.94 133.67,2422.88 ; U6.7 131,1867.79 143.5,1880.29 143.5,1966.91 133.64,1976.77 133.64,2060.73 121.54,2072.83 P6.1 121.54,2127.95 133.64,2140.06 133.64,2310.73 121.54,2322.83 P8.1 121.54,2377.95 133.64,2390.06 133.64,2422.85
CAN_RX: U3.17 U6.4 | length 474.9
  Power w10: U6.4 231,1646.5 269.5,1685 v1(270,1685)
  Digital_signal w10: v1(270,1685) 331.61,1746.61 U3.17
CAN_TX: U3.18 U6.1 | length 526.2
  Power w10: U6.1 83,1621 83,1693 v1(85,1695)
  Digital_signal w10: v1(85,1695) 85,1740 306.02,1961.02 U3.18
GND: C2.1 C3.1 C4.1 C5.1 C6.1 C7.2 C11.1 C12.1 C13.2 C14.1 C15.1 C16.1 C17.1 C18.2 C19.2 C20.2 C21.1 C22.1 C23.1 C24.1 C25.2 C26.1 C27.2 C28.2 C30.2 C31.2 C32.2 C33.1 C34.2 C35.2 C36.1 C37.1 C38.1 C39.1 C40.1 C41.1 C42.1 C43.1 C44.1 C45.2 C46.1 C47.1 C48.1 C49.1 C50.1 C51.1 LED3.2 P4.2 P5.2 Q9.2 R2.1 R6.2 R8.1 R14.2 R16.1 R17.1 R19.2 R29.1 R37.1 S1.2 U1.17 U1.20 U1.28 U1.29 U1.30 U1.34 U1.39 U2.1 U2.5 U3.15 U4.9 U5.1 U6.2 U6.8 VIN.2 VOUT.2 X1.2 X1.4 | length 8500.3
  Power w10: U6.8 81,1759 132.61,1707.39 v3(134.63,1707.39) ; C38.1@135.63,1535 133.32,1537.31 133.32,1616.68 U6.2 133.58,1621.58 133.58,1706.34 v3(134.63,1707.39) ; P5.2 v2(355,3000) ; v2@384,2129.56 388.44,2125.13 388.44,2079.84 393.28,2075 397.93,2075 397.93,2063.51 370,2035.58 370,1870 265,1765 194.44,1765 136.83,1707.39 v3(134.63,1707.39) ; C20.2@520.25,2500 620.27,2500 632.28,2487.99 v1(653.93,2487.99) ; v1(550,2285) 550,2245.24 555.24,2240 695,2240 743.2,2240 752.5,2230.7 755,2230.7 760,2225.7 C23.1@760,2223.2 ; C41.1@1050,534.68 1050,561.17 1046.17,565 v1(1050,565) ; C4.1@1065,271.65 1078.35,285 1119.08,285 R8.1@1117.65,285 ; R8.1@1117.11,285 R8.1@1117.65,285 ; R2.1@1135.73,125 1140.65,125 1146.28,119.37 1146.28,108.72 1165,90 1355,90 1430,165 U1.39@1430,295.63 ; v1(1205,580) 1207,578 1232,578 1273.82,536.18 U1.20 ; v1(1260,375) 1263.79,375 1267.49,378.7 U1.28 ; U1.34@1306.46,260.59 1260.67,260.59 1211.26,310 1130,310 1122.49,302.49 1122.49,289.84 R8.1@1117.65,285 ; U1.34 1393.7,260.59 1405.59,272.48 1406.85,272.48 U1.39@1430,295.63 ; U1.30 U1.39@1434.33,339.33 ; U1.29 1429.02,359.02 v1(1430,360) v1(1455,360) 1475,340 1475,139.06 1502.03,112.03 1646.97,112.03 1667.5,91.5 1670,91.5 1675,86.5 C3.1@1675,84 ; R14.2@1395,1020 1450,1020 1460,1010 1460,915 ; 1435,1045 1435.22,1045.22 v1(1435.22,1090) ; U1.39@1442.01,347.01 U1.39@1434.33,339.33 ; v1(1477.02,512.98) 1493.19,496.81 U1.17 ; C2.1@1744.68,180 1818.46,180 C6.1@1856.06,217.6 ; C5.1@1767.11,229.39 1771.5,225 v1(1844.33,225) ; C6.1@1844.33,217.6 C6.1@1851.73,217.6 ; C6.1 C6.1@1856.06,217.6 ; C12.1@1875,471 v1@1910,471 ; v1(1910,470) 1940.16,470 1945,465.16 C11.1@1945,464.68 ; v1(1950,3045) 1950.16,3044.84 1989.84,3044.84 R37.1@1990,3044.68 ; C33.1@2450,2631.8 2450,2629.3 2505,2574.3 U4.9 ; C35.2@2805,2584.37 v1(2805,2620) ; U1.39@1430,295.63 1430,335 U1.39@1434.33,339.33 ; v1(1844.33,225) C6.1@1851.73,217.6 ; v1(1844.33,225) 1848.66,225 C6.1@1856.06,217.6 ; C6.1@1851.73,217.6 C6.1@1856.06,217.6
  Power w15: v2(250.45,2436.01) 250.45,2399.55 305,2345 305,2144.7 323.2,2126.5 347.49,2126.5 347.68,2126.69 381.74,2126.69 v2(384.61,2129.56)
  A_signal w10: v2(384.61,2129.56) 379.2,2129.56 363.72,2114.08 353.48,2114.08 352.4,2113 303,2113 235,2045 235,1795 315,1715 315,485 498,302 498,272 v1(500,270) ; v1(1260,375) 1279,394 1279,994 1375,1090 v1(1435.22,1090)
  Digital_signal w10: R6.2@115,1335 115,1337.5 120,1342.5 122.5,1342.5 138,1358 163,1358 v1(165,1360) ; v1(120,2695) 120,2681.8 R16.1@135,2666.8 ; C27.2@210,2580 216.85,2580 228.62,2591.77 241.77,2591.77 X1.2 ; v2(250.45,2436.01) 258.99,2436.01 288.9,2406.1 C28.2@315.87,2406.1 ; R29.1@295,3049.37 358.5,3049.37 358.83,3049.05 358.83,3003.83 v2(355,3000) ; U3.15 383.62,2052.8 383.62,2128.58 v2(384.61,2129.56) ; U2.5 v1(500,270) ; v1(2190,2500) 2205.19,2515.19 2215.5,2515.19 C34.2@2220.31,2520 ; R19.2@2635,934.69 2635,936.65 2668.35,970 2760,970 2772.5,957.5 2772.5,857.5 VIN.2
  Digital_signal w15: v2(250.45,2436.01) 250.45,2458.81 260,2468.35 260,2533.06 268.84,2541.9 X1.2 ; R29.1@295,3048.2 R29.1@295.9,3049.1 ; U2.1 v1(700,270)
  other v1: 165,40 235,40 311.11,40 387.22,40 463.33,40 539.44,40 615.56,40 691.67,40 767.78,40 843.89,40 920,40 2005,50 2075,50 2151.11,50 2227.22,50 2303.33,50 2379.44,50 2455.56,50 2531.67,50 2607.78,50 2683.89,50 2760,50 2805,100 2845,145 2890,210 1875,225 2890,270 1430,315.32 1455,315 1480,315 2890,330 1480,360 2890,390 1430,405 1455,405 1480,405 2890,450 2890,510 2890,570 1340.71,655 1381.43,655 1422.14,655 1462.86,655 1503.57,655 1544.29,655 1585,655 1340.71,705 1381.43,705 1422.14,705 1462.86,705 1503.57,705 1544.29,705 1585,705 1340.71,750 1381.43,750 1422.14,750 1462.86,750 1503.57,750 1544.29,750 1585,750 1340.71,800 1381.43,800 1422.14,800 1462.86,800 1503.57,800 1544.29,800 1585,800 661.16,831.07 701.16,831.07 1340.71,840 1381.43,840 1422.14,840 1462.86,840 1503.57,840 1544.29,840 1585,840 661.16,876.07 701.16,876.07 1340.71,890 1381.43,890 1422.14,890 1462.86,890 1503.57,890 1544.29,890 1585,890 661.16,921.07 701.16,921.07 1340,935 1380.71,935 1421.43,935 1502.86,935 1543.57,935 1584.29,935 661.16,966.07 701.16,966.07 620,1025 660,1025 171.5,1028.61 211.5,1028.61 326.5,1028.61 101.5,1033.61 141.5,1033.61 256.5,1033.61 296.5,1033.61 620,1070 660,1070 171.5,1073.61 211.5,1073.61 326.5,1073.61 101.5,1078.61 141.5,1078.61 256.5,1078.61 296.5,1078.61 620,1115 660,1115 171.5,1118.61 211.5,1118.61 326.5,1118.61 101.5,1123.61 141.5,1123.61 256.5,1123.61 296.5,1123.61 620,1160 660,1160 171.5,1163.61 211.5,1163.61 326.5,1163.61 256.5,1168.61 296.5,1168.61 2723.19,1643.49 2763.19,1643.49 2578.19,1648.49 2618.19,1648.49 2653.19,1648.49 2693.19,1648.49 2723.19,1688.49 2763.19,1688.49 2578.19,1693.49 2618.19,1693.49 2653.19,1693.49 2693.19,1693.49 513,1725 538.91,1731.68 2723.19,1733.49 2763.19,1733.49 2578.19,1738.49 2618.19,1738.49 2653.19,1738.49 2693.19,1738.49 513,1755 538.36,1758.98 2723.19,1778.49 2763.19,1778.49 2578.19,1783.49 2618.19,1783.49 2653.19,1783.49 2693.19,1783.49 538.36,1783.98 513,1785 538.36,1808.98 513,1815 2723.19,1823.49 2763.19,1823.49 2578.19,1828.49 2618.19,1828.49 2653.19,1828.49 2693.19,1828.49 2653.19,1873.49 2693.19,1873.49 2723.19,1873.49 2763.19,1873.49 2580,1875 2620,1875 2653.19,1918.49 2693.19,1918.49 2723.19,1918.49 2763.19,1918.49 2580,1920 2620,1920 2653.19,1963.49 2693.19,1963.49 2723.19,1963.49 2763.19,1963.49 2580,1965 2620,1965 2653.19,2008.49 2693.19,2008.49 2723.19,2008.49 2763.19,2008.49 2580,2010 2620,2010 2653.19,2053.49 2693.19,2053.49 2723.19,2053.49 2763.19,2053.49 2580,2055 2620,2055 2005,2113 2280,2300 2790,2330 2485,2430 2525,2430 2485,2470 2525,2470 2485,2510 2525,2510 2485,2550 2525,2550 685,2750 705,2750 750.5,2850 785,2850 750.5,2880 785,2880 2250,2895 2255,3010 1772.4,3020
  other v4: 675.2,700.32
  other v5: 1460,2510
INTVCC: C11.2 C12.2 C41.2 D1.1 D2.1 R3.1 R9.2 U1.13 | length 1638.6
  Power w10: C41.2@1050,485 1065,470 D2.1@1115,470 ; v1(1120,385) 1120,354.3 1134.3,340 R9.2@1165.31,340 ; U1.13 1659.4,418.07 1687.84,418.07 1743.07,418.07 v1(1746.53,421.54) 1782.61,421.54 1784.14,420 D1.1@1795,430.86 ; v1(1660,300) 1700.6,300 R3.1@1699.7,299.1 ; R3.1@1698.79,296.06 1699.7,296.97 R3.1@1699.7,299.1 ; 1699.7,303.19 R3.1@1699.7,299.1 ; D1.1 1800,425 v1(1907.5,425) C11.2@1940,425
  A_signal w10: v1(1660,300) 1683,323 1683,358 v1(1746.53,421.54)
  Digital_signal w10: v1(1120,385) 1117.32,387.68 1117.32,395.54 1115,397.86 v1(1115,472.48) 1116.58,472.48 1127.86,483.76 1848.74,483.76 v1(1907.5,425)
ISP: C8.2 C13.1 C14.2 C15.2 C16.2 C17.2 C40.2 C42.2 C43.2 C44.2 C46.2 C48.2 C49.2 Q3.2 Q7.2 R15.1 U1.25 | length 785.7
  Power w10: 755,500 700.86,500 695,494.14 695,450 749,396 992.49,396 998.12,401.63 1056.63,401.63 1085,430 1140,430 1153.13,443.13 1183.76,443.13 1185,444.37 1209.84,444.37 1216.46,437.76 U1.25
IVINN: C18.1 C19.1 C21.2 C22.2 C39.2 C50.2 Q1.2 Q5.2 R1.1 R10.2 | length 878.7
  Power w10: R1.1@1844.69,350 1920,350 1936.3,366.3 2121.3,366.3 2329,574 2329,749.14 2323.14,755 R10.2
LED_Green: R38.1 U3.14 | length 1598.2
  Power w10: v1(830,2270) 885,2270 v1(935,2320)
  Digital_signal w10: U3.14 408.39,2079.19 441.19,2112 554.7,2112 712.7,2270 v1(830,2270) ; v1(935,2320) 945,2320 960,2335 1730,2335 1775,2290 1775,2223.83 1777.02,2221.81 1777.02,2219.84 1781.86,2215 R38.1@1783.83,2215
NetC1_2: C1.2 R1.2 U1.11 | length 227
  Power w10: U1.11 1581.06,378.78 1711.38,378.78 1741.38,348.78 1793.78,348.78 1795,350
NetC3_2: C3.2 R4.2 U1.2 | length 226.6
  Power w10: U1.2 1628.79,201.54 1640,190.32 1640,167.5 1675,132.5 C3.2@1675,130 ; C3.2@1680,132.5 1680,130 1680,121.54 1680.63,120.91 1699.09,120.91 1718.19,101.81 1740.16,101.81 1745,96.97 R4.2@1745,95
NetC4_2: C4.2 R7.1 | length 58.3
  Power w10: C4.2@1065,225 1065,222.5 1077.5,210 1115.32,210 ; R7.1@1125,210 R7.1@1125.32,210
NetC8_1: C8.1 R11.1 U1.26 | length 267.6
  Power w10: R11.1@1059.37,380 1061.34,380 1066.18,384.84 1066.18,386.81 1087.37,408 1182,408 1185,405 1185,406.97 1189.84,411.81 1209.28,411.81 1215.47,418 U1.26@1306.46,418
NetC9_2: C9.2 D1.2 U1.15 | length 238.8
  Power w10: U1.15@1603.54,457.44 1632.44,457.44 1649.3,474.3 1689.3,474.3 1689.3,472.71 1700,462 1703,465 1750,465 1784.96,499.96 1788.19,499.96 1795,506.77 D1.2
NetC10_2: C10.2 D2.2 U1.22 | length 262.2
  Power w10: D2.2 1115,554.25 1121.81,547.44 1142.56,547.44 1190.88,499.12 C10.2@1205,499.12 ; C10.2@1205,492.5 C10.2@1205,499.12 ; C10.2@1210,494.12 C10.2@1205,499.12 ; C10.2@1210,494.52 1212.21,496.73 1328.94,496.73 U1.22
NetC20_1: C20.1 L3.2 U3.5 | length 428.7
  Power w15: v2(410,2405) 486.8,2481.8 C20.1@486.8,2500 ; L3.2 481.8,2646.1 C20.1@481.8,2509.49
  Digital_signal w15: U3.5 357.2,2352.2 v2(410,2405)
NetC23_2: C23.2 R22.2 S1.1 U3.4 | length 612.9
  Power w10: R22.2@601.87,2075.84 580.87,2075.84 550,2106.72 550,2148.15 555.24,2153.39 695,2153.39 703.06,2161.45 746.45,2161.45 752.5,2167.5 755,2167.5 C23.2@760,2172.5
  Digital_signal w10: U3.4@331.61,2264.42 331.61,2233.7 393.31,2172 401.57,2172 408.57,2165 542.14,2165 552.14,2155 v1(555,2155)
NetC24_2: C24.2 L2.1 U2.11 | length 1064.7
  Digital_signal w15: U2.11 550,495 551.85,496.85 551.85,698.67 C24.2 550.2,1418.1 L2.1
NetC29_1: C29.1 L4.1 R33.1 U4.8 | length 750.9
  Power w10: L4.1 2217.41,2632.41 2307.41,2632.41 2353.2,2678.2 R33.1@2390,2678.2 ; 2215,2421.2 2220,2416.2 ; L4.1@2220,2635 L4.1@2231.35,2646.35
  Power w15: C29.1@2206.8,2465 2209.3,2465 2211.8,2462.5 2211.8,2460 2215,2456.8 2215,2421.2
  Power w30: L4.1@2125,2631.81 2125,2481.2 2190,2416.2 2220,2416.2 U4.8
NetC29_2: C29.2 U4.7 | length 133.5
  Power w10: C29.2@2255,2465 C29.2@2255.6,2465.6 ; U4.7@2395.64,2465.6 U4.7
  Power w15: C29.2@2263.8,2465.6 U4.7@2395.64,2465.6
NetC33_2: C33.2 R33.2 | length 80.9
  Power w10: R33.2@2390,2635 2390,2636.59 2394.84,2641.43 2406.43,2641.43 2433.57,2668.57 2445.16,2668.57 2450,2673.41 C33.2@2450,2677.5
NetC35_1: C35.1 R32.1 U4.3 | length 287.6
  Power w10: U4.3 2778.16,2516.2 2805,2543.03 2805,2547.18 2810.63,2552.81 2822.81,2552.81 2851.87,2581.87 2864.37,2581.87 2870,2587.5 R32.1@2870,2589.37
NetLED2_1: LED2.1 R34.2 | length 504.8
  Digital_signal w15: R34.2@2056.95,2216.25 2436.25,2216.25 v1(2525,2305)
NetLED2_2: LED2.2 Q9.3 | length 617.3
  Digital_signal w15: Q9.3 2370,2075 v1(2605,2310)
NetLED3_1: LED3.1 R36.1 | length 140.6
  Digital_signal w15: R36.1@2049.37,2300 v1(2190,2300)
NetQ9_1: Q9.1 R38.2 | length 303.9
  Digital_signal w15: R38.2@1823.2,2215 1823.2,2131.8 1917,2038 Q9.1
NetR2_2: R2.2 U1.38 | length 169.4
  Power w10: R2.2@1183.2,125 1215,125 1271.85,181.85 U1.38
NetR3_2: R3.2 U1.5 | length 121.5
  Power w10: U1.5 1695.16,260.59 1700,255.75 R3.2@1700,255.31
NetR7_2: R7.2 U1.36 | length 169
  Power w10: R7.2@1164.69,210 1235,210 1246.22,221.22 U1.36
NetR8_2: R8.2 U1.35 | length 169
  Power w10: R8.2@1156.49,285 1205,285 1250,240 1305.63,240 U1.35@1306.46,240.83
NetR9_1: R9.1 U1.4 U1.32 | length 722.6
  Power w10: R9.1@1204.68,337 1233,337 v1(1270,300) v1(1270,300) U1.32@1306.46,299.96 ; U1.4 1652.84,240.91 1679.37,214.37 1699.37,214.37 1700,215 v1(1705,215)
  A_signal w10: v1(1270,300) 1355,215 v1(1705,215)
NetR24_1: R24.1 U2.6 | length 240.9
  Digital_signal w15: 305,170 306.29,168.71 306.29,137.5 328.79,115 425,115 448.35,138.35 448.35,182.88 U2.6
NetR31_1: R31.1 U4.4 | length 131.8
  Power w10: U4.4 2698.8,2566.2 2718.2,2546.8 R31.1@2740,2546.8
OSC_IN: C27.1 U3.2 X1.1 | length 360.5
  Digital_signal w10: C27.1@175.92,2555.92 174.82,2554.82 174.82,2547.75 167.87,2540.8 167.87,2520 X1.1 192.54,2486.99 192.54,2460.65 196.71,2456.47 196.71,2413.29 280.43,2329.57 U3.2 U3.2@280.43,2307.2
OSC_OUT: C28.1 U3.3 X1.3 | length 270.7
  Digital_signal w10: U3.3 306.02,2336.02 350,2380 350,2431.05 346.45,2434.6 346.45,2441.45 360,2455 360,2473.54 X1.3
OUT: C45.1 C47.2 R5.2 R11.2 R12.2 R15.2 VOUT.1 | length 1724.8
  Power w10: R15.2@570,555.86 570,830 ; R15.2@602.89,500 664.14,500 670,494.14 670,450 740,380 R11.2@1020,380 ; R15.2@603.15,455 603.15,421.85 620,405 680,405 805.63,279.37 R12.2@915,279.37
  Digital_signal w10: R5.2@115,1181.8 75,1141.8 75,800 VOUT.1
RB2: R12.1 R13.1 U1.37 U2.2 | length 868.1
  Power w10: R13.1@915,165.7 R12.1@915,240 ; R13.1@918.2,165 1220,165 1256.54,201.54 U1.37
  Power w15: v1(650,250) 655.5,244.5 833.7,244.5 910,168.2 912.5,168.2 915,165.7 R13.1@915,163.2
  Digital_signal w10: U2.2 v1(650,250)
RW2: R13.2 R17.2 U2.4 | length 480.1
  Power w10: R17.2@855,110 857.5,112.5 912.5,112.5 R13.2@915,115
  Power w15: v1(550,105) 585,140 830,140 846.39,123.61 846.39,112.34 848.73,110 R17.2@855,110
  Digital_signal w10: v1(550,105) U2.4
SNSP: Q2.3 Q4.3 Q6.3 Q8.3 R14.1 U1.27 | length 1033.2
  Power w10: v1(1225,395) 1228.31,398.31 U1.27@1306.46,398.31 ; v1(1435,1125) 1455,1145 1455,1175 ; R14.1 1450,1205 R14.1@1455,1200
  A_signal w10: v1(1225,395) 1263,433 1263,1018 1370,1125 v1(1435,1125)
SW1: C9.1 L1.2 Q1.3 Q2.2 Q5.3 Q6.2 U1.16 | length 1070
  Power w10: U1.16 1629.5,477.13 1652.87,500.5 1695,500.5 1700,505.5 1700,506.63 1700.16,506.79 1737.28,506.79 v1(1738.56,508.07)
  A_signal w10: v1@1743.32,508.07 1742.43,508.96 1742.43,513.35 1750,520.92 1750,1250 1848.41,1348.41 1848.41,1349.62 1855,1356.21 v1(1855,1360)
SW2: C10.1 L1.1 Q3.3 Q4.2 Q7.3 Q8.2 U1.21 | length 1073.8
  Power w10: v1(1155,590) 1156.65,590 1205,541.65 C10.1@1205,539.68 ; C10.1@1205,537.72 1209.84,532.87 1212.65,532.87 1229.03,516.5 U1.21
  A_signal w10: v1(1065,1410) 1085,1410 1155,1340 v1(1155,590)
SWCLK: P5.3 R29.2 U3.20 | length 1313.9
  Power w10: P5.3@305,2914.22 P5.3
  Power w15: v1(100,2855) 230,2985 295,2985 305.78,2974.22 P5.3
  Digital_signal w10: v1(100,2855) 60,2815 60,2298.94 254.84,2104.09 U3.20
  Digital_signal w15: 295,3000 295,2927.44 305,2917.44 v1(305,2915)
SWDIO: P5.4 R30.2 U3.19 | length 1139.3
  Digital_signal w10: v1(255,2915) 192.53,2915 91,2813.47 91,2294 280.43,2104.57 U3.19
  Digital_signal w15: 235,3000 235,2937.44 255,2917.44 v1(255,2915)
TG1: Q1.1 Q5.1 U1.14 | length 1433.4
  Power w10: U1.14 1655.28,437.76 v1(1658.6,441.07)
  A_signal w10: v1(1658.6,441.07) 1721.07,441.07 1915,635 v1(1915,1340) 1975,1400 1975,1545 1920,1600 v1(1915,1600)
TG2: Q3.1 Q7.1 U1.24 | length 1613.9
  Power w10: v1(1235,460.76) 1263.61,460.76 1267,457.36 1328.94,457.36 U1.24
  A_signal w10: v1(1005,1760) 1010,1760 1045,1725 1045,1535 v1(1005,1495) 1155,1495 1235,1415 v1(1235,460.76)
UART2_RX: P4.4 U3.9 | length 460.7
  Digital_signal w10: U3.9 460,2278.46 460,2515 531.42,2586.42 v1(653.93,2586.42)
UART2_TX: P4.3 U3.8 | length 722.1
  Power w10: P4.3@625.47,2544.02 632.28,2537.21 P4.3
  Digital_signal w10: U3.8 436,2280.05 436,2513.63 552.37,2630 690,2630 715,2605 715,2555 695,2535 660,2535 v1(657.5,2537.5)
VCC: C1.1 C5.2 C6.2 C7.1 C31.1 C51.2 R10.1 R18.2 R31.2 R32.2 U1.10 U1.12 U4.2 VIN.1 | length 5277.8
  Power w10: U1.10 1708.51,359.02 1738,329.53 1738,307 1752.5,292.5 1755,292.5 1760,287.5 C5.2@1760,285 ; U1.12 1714.4,398.39 1722.78,390 1755.16,390 1760,385.16 1760,385 2100,385 v1(2115,400) ; C5.2@1760,290 1857.6,290 C6.2 2292.4,292.4 2427.5,427.5 2427.5,647.5 2430,650 ; v1(2203,403) 2345,545 2345,749.14 2350.86,755 R10.1 ; R31.2@2740,2595 2740,2655 2770,2685 2900,2685 2920,2665 2920,2555.86 2914.14,2550 2870,2550 2870,2458.27 C31.1@2840.87,2429.13 ; VIN.1@2750,650 VIN.1
  Power w30: U4.2 2640.04,2466.2 2641.23,2465 2755,2465 2789.13,2430.87 2793.5,2430.87 2795.24,2429.13 2840.87,2429.13 2890,2380 2890,760 VIN.1
  A_signal w10: v1(2115,400) 2200,400 v1(2203,403)
  Digital_signal w10: R18.2@2635,805.31 2635,680 2665,650 VIN.1
Vref: C2.2 R4.1 U1.1 U1.3 U1.6 | length 449.9
  Power w10: U1.1 1538.78,181.85 1532.93,187.71 1532.93,207.93 1546.22,221.22 ; U1.6 1545,280.28 1530,265.28 1530,235 1543.78,221.22 1546.22,221.22 ; C2.2@1683.46,184.84 1672.5,195.81 1647.09,221.22 U1.3 1546.22,221.22 ; C2.2@1683.5,184.84 C2.2@1685.4,182.94 ; C2.2@1685.4,180 C2.2@1692.28,180 ; C2.2@1685.4,184.91 C2.2@1690.31,180 ; C2.2 1693.46,180 1699.09,174.37 1699.09,169.45 1721.84,146.7 1739.37,146.7 1745,141.07 R4.1@1745,134.37
pads on no net: L1.3 P4.5 P4.6 P5.5 P5.6 P6.0 P8.0 U1.7 U1.8 U1.23 U1.31 U1.33 U2.3 U2.12 U2.13 U2.14 U4.1

## Polygon pours and split planes (outlines as drawn)
GND on Power "GND_L01_P071" (solid, pour order 71): 10,2895 10,2945 180,3115 2795,3115 2925,2985 2925,170 2765,10 144.75,10 0.11,154.64
ISP on Power "ISP_L01_P047" (solid, pour order 47): 745,415 1220,415 1220,1090 1220,1310 950,1310 945,1305 945,1810 745,1810
GND on Power "GND_L01_P069" (solid, pour order 69): 465,1845 465,1680 580,1680 590,1690 585,1695 585,1845
GND on Power "GND_L01_P068" (solid, pour order 68): 655,2900 650,2895 650,2680 870,2680 875,2685 870,2690 870,2915 650,2915
GND on Power "GND_L01_P066" (solid, pour order 66): 735,1220 740,1225 720,1245 50,1245 50,810 45,805 60,790 295,790 295,965 305,975 635,975 635,620 645,610 735,610
GND on Power "GND_L01_P065" (solid, pour order 65): 2485,2225 2485,1325 2695,1325 2715,1305 2715,890 2695,870 2710,855 2710,770 2850,770 2860,780 2860,2215
VCC on Power "VCC_L01_P042" (solid, pour order 42): 2395,735 2395,1292.5 2670,1292.5 2680,1277.5 2680,1262.5 2680,735
ISP on Power "ISP_L01_P049" (solid, pour order 49): 310,1595 310,1235 690,1235 795,1235 795,1595
GND on Power "GND_L01_P064" (solid, pour order 64): 1334.52,1068.81 1340,1074.3 1340,1305 1225,1305 1220,1310 1215,1305 1215,760 1380,760 1390,750 1705,750 1705,1220 1725,1240 1715,1250 1585,1250 1585,1080 1565,1060
SNSP on Power "SNSP_L01_P063" (solid, pour order 63): 1345,1400 1345,1150 1550,1150 1550,1400 1560,1410
GND on Power "GND_L01_P040" (solid, pour order 40): 1216.28,1068.81 1452.75,1068.81 1714.49,1065 1714.49,603.81 1511.28,603.81 1401.28,603.81 1296.28,603.81 1216.28,603.81
GND on Power "GND_L01_P053" (solid, pour order 53): 1560,965 1560,1065 1700.15,1065 1720,1045.15 1720,965 1565,965 1555,955
ISP on Power "ISP_L01_P062" (solid, pour order 62): 655,1625 655,1810 805,1810 855,1760 855,1570 665,1570 650,1585
OUT on Power "OUT_L01_P051" (solid, pour order 51): 625,390 625,940 310,940 310,785 95,785 95,390
ISP on Power "ISP_L01_P058" (solid, pour order 58): 758.04,813.99 763.14,808.89 763.14,740.1 1024.9,740.1 1030,735 1030,800
ISP on Power "ISP_L01_P050" (solid, pour order 50): 975,915 975,640 1210,640 1210,925
IVINN on Power "IVINN_L01_P043" (solid, pour order 43): 1980,1825 1980,2205 2165,2205 2170,2210 2455,2210 2455,1570 2290,1570
SNSP on Power "SNSP_L01_P046" (solid, pour order 46): 1290,1810 1290,1310 1638.62,1310 1630,1810
SW2 on Power "SW2_L01_P045" (solid, pour order 45): 955,1320 955,2260 960,2265 965,2260 1450,2260 1450,1830 1285,1830 1285,1320 1275,1310
SW1 on Power "SW1_L01_P044" (solid, pour order 44): 1450,2260 1455,2255 1455,1825 1630,1825 1630,1250 1970,1250 1965,1255 1965,2260
IVINN on Power "IVINN_L01_P039" (solid, pour order 39): 2300,655 1980,655 1980,1845 2300,1845
IVINN on Power "IVINN_L01_P041" (solid, pour order 41): 1965,1230 1955,1240 1725,1240 1725,595 2085,595 2085,1240 2100,1255
VCC on Power "VCC_L01_P052" (solid, pour order 52): 2395,755 2395,535 2890,535 2890,755
GND on PGND "GND_L02_P059" (solid, pour order 59): 130,25 2800,25 2920,145 2920,2965 2790,3095 215,3095 210,3100 40,2930 40,2920
GND on PGND "GND_L02_P060" (solid, pour order 60): 130,25 35,120 40,125 40,2930 80,2930

## Keep-outs
Keep-Out Layer:
  lines w10: -5,2930 -5,164.76 ccw(c161.32,164.76) 161.32,-1.56 ; -4.69,2923.99 cw(c206.32,2923.99) 206.32,3135 ; 166.32,0 2743.68,0 ; 201.32,3135 2778.68,3135 ; 2738.68,0 ccw(c2738.68,211.01) 2949.69,211.01 2949.69,2959.69 2949.69,2974.69 ; 2783.68,3136.56 cw(c2783.68,2970.24) 2950,2970.24

## Other copper
Power:
  pour cut-out: 1705,1235 1705,600 1710,605 1755,605 1755,1240
  pour cut-out: 1195,1300 1190,1295 1190,630 1230,630 1235,625 1245,635 1245,1300
  pour cut-out: 965,526.74 965,42.5 1940,42.5 1940,517.5 1929.22,528.28
  pour cut-out: 1340,1165 1340,1065 1545,1065 1560,1080 1560,1165
  pour cut-out: 970,625 970,450 980.81,439.19 1215.03,439.19 1215.03,614.97 1210,620
  pour cut-out: 95,570 390,570 390,420 355,385 345,395 90,395
  pour cut-out: 225,2470 225,2415 270,2415 275,2420 270,2425 270,2470
  pour cut-out: 1936.3,366.3 1936.3,293.7 1940,290 1953.62,303.62 2328.62,303.62 2395,375 2395,630 2395,755.29 2383.49,743.78 2356.22,743.78 2356.22,536.22 2175,355 2150,355
  pour cut-out: 920,390 940,370 940,176.22 993.78,176.22 990,180 990,420 930,420
  pour cut-out: 60,1890 60,1875 100,1875 105,1880 105,1890
  pour cut-out: 110,1660 110,1570 155,1570 155,1660
  pour cut-out: 65,1880 60,1875 60,1790 105,1790 105,1880 80,1880 75,1875
  pour cut-out: 2751.22,2650.35 2775.86,2675 2894.14,2675 2910,2659.14 2910,2514.13 2850.87,2455 2790,2455 2790,2465 2740,2515 2740,2615
  pour cut-out: 2895.35,2673.78 2895.35,635.35 2890,630 2895,625 2940,625 2940,2660.86 2927.93,2672.93
  pour cut-out: 1215,530.52 1770.52,530.52 1775,535 1775,600 1215,600
  pour cut-out: 485,255 515,255 515,285 485,285
  pour cut-out: 580,985 580,935 635,935 645,945 645,965 591.49,965 585,958.51
  pour cut-out: 820,3075 820,3125 2155,3125 2165,3115 2165,3075
  pour cut-out: 895,275 900,270 900,90 935,90 940,95 940,280
  pour cut-out: 2305,750 2305,650 2300,645 2090,645 2090,590 2085,585 1915,585 1915,395 1920,390 1930,400 2140,400 2140,405 2320,585 2320,750
  pour cut-out: 1725,600 1725,545 1910,545 1915,550 1915,600
PGND:
  pour cut-out: 1390,1160 1390,1065 1400,1055 1480,1055 1480,1155 1475,1160
  pour cut-out: 225,2455 225,2410 270,2410 270,2450 275,2455
  pour cut-out: 485,285 485,255 515,255 515,285

## Silkscreen, mask and mechanical layers (free items; w line width, h text height)
Top Overlay:
  text "VCC" at 2756,581 h30
Top Paste:
  pour cut-out: 1410,1150 1410,1070 1451.56,1070 1452.75,1068.81 1465,1081.06 1465,1150
Top Solder:
  circle w10: c2390,175 r59.06
  circle w10: c205,180 r59.06

## Text inside footprints (layer, text, board x,y; h text height)
L4: Mechanical 5 "C5.8 H4.5 W5.2 L5.8" at 2314.27,2570.15 h30 r90
LED2: Top Overlay "+" at 2476,2286 h30
LED3: Top Overlay "+" at 2146,2281 h30
VIN: Top Overlay "-" at 2703,930 h30 r90; Bottom Overlay "+" at 2889.24,557.89 h30 r90; Bottom Overlay "-" at 2703,950 h30 r90
VOUT: Top Overlay "-" at 108,970 h30 r90; Bottom Overlay "+" at 294.24,597.89 h30 r90; Bottom Overlay "-" at 108,990 h30 r90